# Altium PCB PCB1.PcbDoc
Units mm, origin at the board's own origin, x right, y up, seen from the top; angles counter-clockwise.
Board outline 60 x 50 mm, 2 copper layers (Top Layer, Bottom Layer); 43 components, 93 nets, 219 pads, 44 vias.
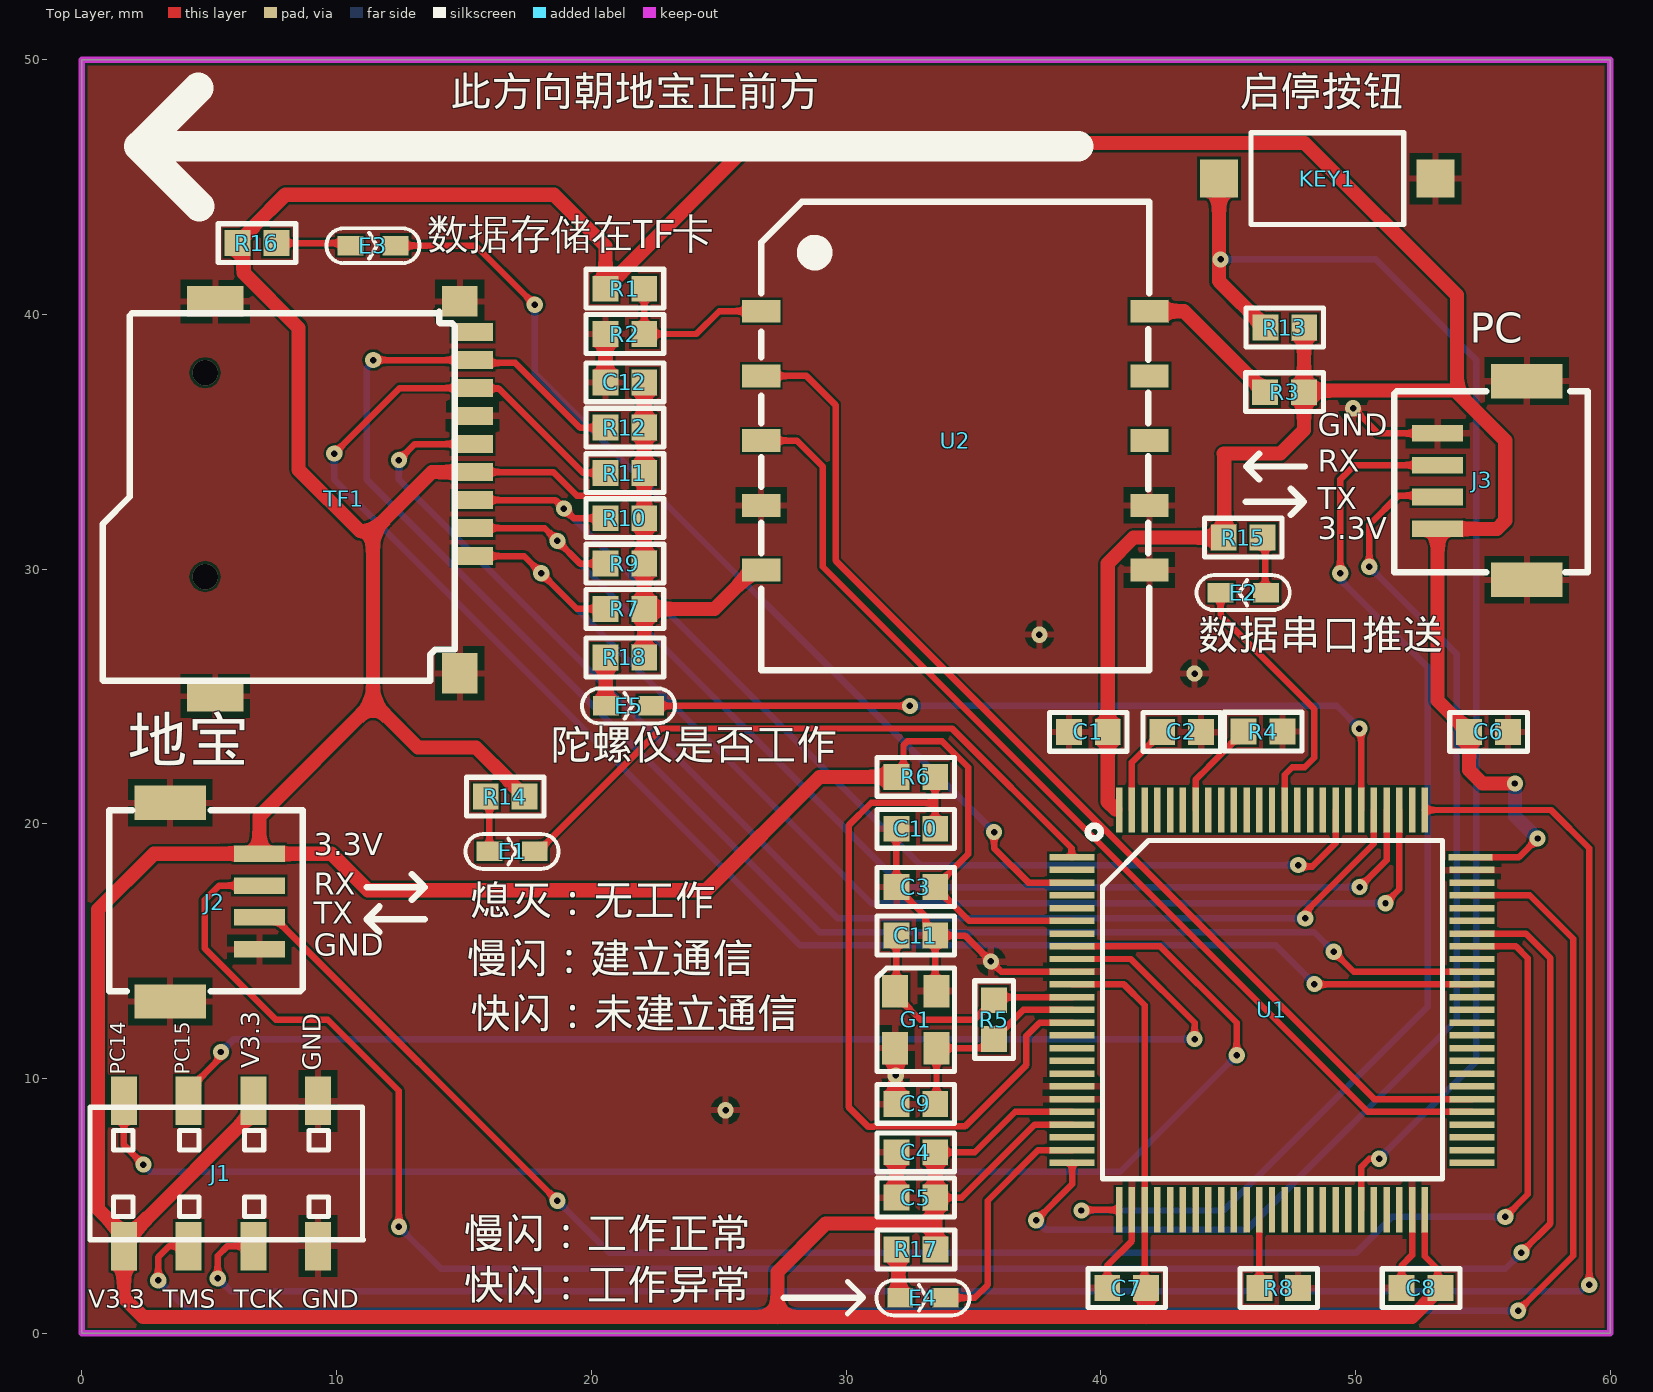
[diagram p0: Top Layer view]
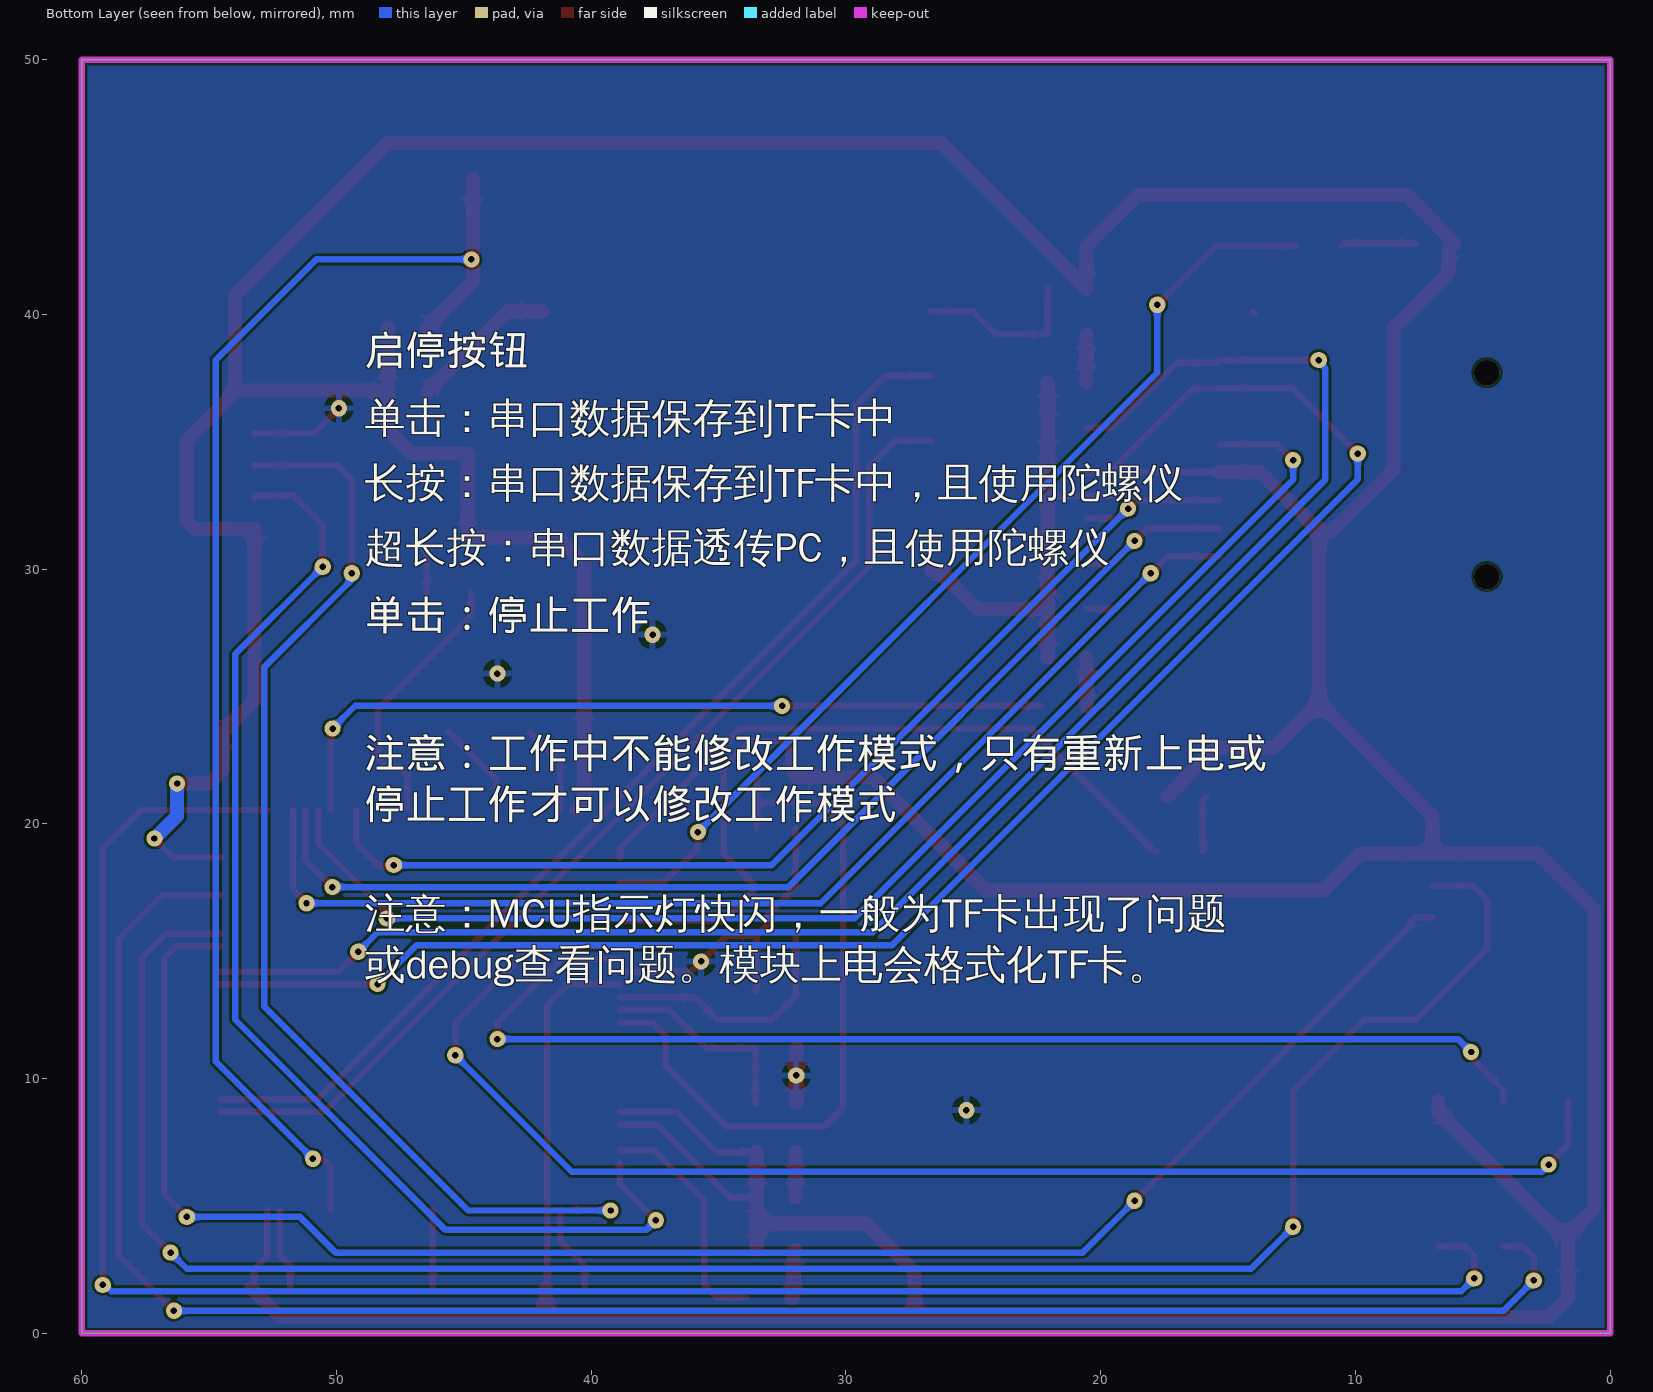
[diagram p1: Bottom Layer view, seen from below]

## Layer stack, top to bottom
Top Solder: solder mask 0.0102, Solder Resist, Dk 3.5
Top Layer: signal copper 0.0356
Dielectric 1: dielectric 0.32, FR-4, Dk 4.8
Bottom Layer: signal copper 0.0356
Bottom Solder: solder mask 0.0102, Solder Resist, Dk 3.5

## Board outline
0,0 60,0 60,50 0,50

## Design rules (kind name [scope] priority, off if disabled: settings)
Clearance [All] p1: gap=0.1 ignorepadtopadclearanceinfootprint=FALSE
PolygonConnect [All] p1: connectstyle=Relief reliefconductorwidth=0.254 reliefentries=4 polygonreliefangle="90 Angle" airgapwidth=0.254
RoutingVias [All] p1: holewidth=0.711 width=1.27 viastyle="Through Hole" minholewidth=0.711 minwidth=1.27 maxholewidth=0.711 maxwidth=1.27
SolderMaskExpansion [All] p1: expansion=0.102 istentingtop=FALSE
Width [All] p1: maxlimit=1.254 minlimit=0.254 preferedwidth=0.254
30 further rules are at their usual default settings.

## Components (designator, comment, footprint, x,y, rotation, side; value= is the part's Value field where it differs from the comment)
C1 "4.7u" 0603 40.259,23.61 r180 top
C2 "4.7u" 0603 43.925,23.61 r180 top
C3 "104" 0603 31.996,17.532 r0 top
C4 "105" 0603 33.485,7.106 r180 top
C5 "104" 0603 33.485,5.328 r180 top
C6 "104" 0603 54.483,23.622 r0 top
C7 "104" 0603 41.766,1.772 r180 top
C8 "104" 0603 53.323,1.772 r180 top
C9 "18pF" 0603 31.996,9.017 r0 top
C10 "104" 0603 33.485,19.806 r180 top
C11 "18pF" 0603 33.485,15.615 r180 top
C12 "104" 0603 22.063,37.332 r180 top
E1 "LED" LED_0603L 15.748,18.923 r0 top
E2 "LED" LED_0603L 46.736,29.083 r180 top
E3 "LED" LED_0603L 10.287,42.703 r0 top
E4 "LED" LED_0603L 31.877,1.397 r0 top
E5 "LED" LED_0603L 20.32,24.638 r0 top
G1 "25MHz(无源贴片)" G3225 32.741,12.319 r270 top
J1 "Pin HDR2X4" "PIN HDR2X4/2.54SMD" 1.651,4.953 r0 top
J2 "Pin HDR1X6" "PIN GH1.25-4PING SMD" 5.969,14.732 r270 top
J3 "Pin HDR1X6" "PIN GH1.25-4PING SMD" 54.229,35.687 r90 top
KEY1 "H-3650AADW(NC)" SW_PB_2P 48.895,45.339 r0 top value=SW_PB_2P
R1 "0" 0603 20.574,41.021 r0 top
R2 "0" 0603 20.574,39.243 r0 top
R3 "0" 0603 46.474,36.957 r0 top
R4 "1k" 0603 47.117,23.622 r180 top
R5 "1M" 0603 35.808,11.574 r90 top
R6 "1k" 0603 33.485,21.844 r180 top
R7 "47K" 0603 20.574,28.448 r0 top
R8 "1k" 0603 47.735,1.772 r180 top
R9 "47K" 0603 20.574,30.226 r0 top
R10 "47K" 0603 20.574,32.01 r0 top
R11 "47K" 0603 20.574,33.782 r0 top
R12 "47K" 0603 20.574,35.566 r0 top
R13 "1k" 0603 46.482,39.497 r0 top
R14 "1k" 0603 15.875,21.082 r0 top
R15 "1k" 0603 46.338,31.236 r180 top
R16 "1k" 0603 7.62,42.799 r180 top
R17 "1k" 0603 32.004,3.302 r0 top
R18 "1k" 0603 20.574,26.543 r0 top
TF1 "TF" TF 10.287,32.766 r180 top
U1 "STM32F207VCT6" LQFP-100 46.736,12.7 r0 top
U2 "espon_mode" ESPON_MODE 26.67,40.132 r0 top

## Footprints (in the part's own frame and the unit in brackets; to place one, negate y for a bottom-side part, rotate by r counter-clockwise, add the part's x,y. Pads: shape width x height; smd on the part's side, far side on the other; paste and mask are expansions set on the pad)
0603 [mil] "0603封装"
  rect 40x40 smd: 1(-0.68,-0.23) 2(59.32,-0.23)
  silkscreen extent -31,-30 89,30, body extent -1,-16 62,16, height 18
ESPON_MODE [mm] "espon_mode"
  rect 1.5x0.9 smd: 1(0,0) 2(0,-2.54) 3(0,-5.08) 4(0,-7.62) 5(0,-10.16) 6(15.24,-10.16) 7(15.24,-7.62) 8(15.24,-5.08) 9(15.24,-2.54) 10(15.24,0)
  silkscreen extent 0,-14.1 15.24,4.3
G3225 [mil] "3225贴片晶振"
  rect 50x40 smd: 1(-44,-32) 2(44,-32) 3(44,32) 4(-44,32)
  silkscreen extent -80,-60 80,60, body extent -63,-49 63,49, height 32
LED_0603L [mil] "LED"
  rect 40x30 smd: 1(10,0) 2(80,0)
  silkscreen extent -27,-27 117,27, body extent 14,-16 77,16, height 24
LQFP-100 [mil]
  rect 70x10 smd: 1(-309.5,236.22) 2(-309.5,216.53) 3(-309.5,196.85) 4(-309.5,177.16) 5(-309.5,157.48) 6(-309.5,137.79) 7(-309.5,118.11) 8(-309.5,98.42) 9(-309.5,78.74) 10(-309.5,59.05) 11(-309.5,39.37) 12(-309.5,19.68) 13(-309.5,0) 14(-309.5,-19.69) 15(-309.5,-39.37) 16(-309.5,-59.06) 17(-309.5,-78.74) 18(-309.5,-98.43) 19(-309.5,-118.11) 20(-309.5,-137.8) 21(-309.5,-157.48) 22(-309.5,-177.17) 23(-309.5,-196.85) 24(-309.5,-216.54) 25(-309.5,-236.22) 51(308.61,-236.22) 52(308.61,-216.54) 53(308.61,-196.85) 54(308.61,-177.17) 55(308.61,-157.48) 56(308.61,-137.8) 57(308.61,-118.11) 58(308.61,-98.43) 59(308.61,-78.74) 60(308.61,-59.06) 61(308.61,-39.37) 62(308.61,-19.69) 63(308.61,0) 64(308.61,19.68) 65(308.61,39.37) 66(308.61,59.05) 67(308.61,78.74) 68(308.61,98.42) 69(308.61,118.11) 70(308.61,137.79) 71(308.61,157.48) 72(308.61,177.16) 73(308.61,196.85) 74(308.61,216.53)
  rect 10x70 smd: 26(-236.67,-309.06) 27(-216.98,-309.06) 28(-197.3,-309.06) 29(-177.61,-309.06) 30(-157.93,-309.06) 31(-138.24,-309.06) 32(-118.55,-309.06) 33(-98.87,-309.06) 34(-79.18,-309.06) 35(-59.5,-309.06) 36(-39.82,-309.06) 37(-20.13,-309.06) 38(-0.45,-309.06) 39(19.24,-309.06) 40(38.93,-309.06) 41(58.61,-309.06) 42(78.3,-309.06) 43(97.98,-309.06) 44(117.66,-309.06) 45(137.35,-309.06) 46(157.03,-309.06) 47(176.72,-309.06) 48(196.41,-309.06) 49(216.09,-309.06) 50(235.78,-309.06) 76(235.78,309.05) 77(216.09,309.05) 78(196.41,309.05) 79(176.72,309.05) 80(157.04,309.05) 81(137.35,309.05) 82(117.67,309.05) 83(97.98,309.05) 84(78.3,309.05) 85(58.61,309.05) 86(38.93,309.05) 87(19.24,309.05) 88(-0.44,309.05) 89(-20.13,309.05) 90(-39.81,309.05) 91(-59.5,309.05) 92(-79.18,309.05) 93(-98.87,309.05) 94(-118.55,309.05) 95(-138.24,309.05) 96(-157.93,309.05) 97(-177.61,309.05) 98(-197.3,309.05) 99(-216.98,309.05) 100(-236.66,309.05)
  rect 68x10 smd: 75(306.61,236.22)
  silkscreen extent -285,-261 263,285, body extent -316,-321 315,309, height 57
"PIN GH1.25-4PING SMD" [mm] "GH1.25 4pin"
  rect 0.65x2 smd: 1(-4.1,1) 2(-2.85,1) 3(-1.6,1) 4(-0.35,1)
  rect 1.35x2.8 smd: 5(-6.1,-2.5) 6(1.7,-2.5)
  silkscreen extent -5.8,-4.9 1.3,2.7
"PIN HDR2X4/2.54SMD" [mm] "4pin双排2.54贴片"
  rect 1.02x1.9 smd: 1(0,-1.524) 2(0,4.176) 3(2.54,-1.524) 4(2.54,4.176) 5(5.08,-1.524) 6(5.08,4.176) 7(7.62,-1.524) 8(7.62,4.176)
  silkscreen extent -1.33,-1.27 9.4,3.93, body extent -1.27,-1.78 8.95,4.62, height 5.15
SW_PB_2P [mm] "2脚贴片按钮"
  rect 1.5x1.5 smd: 1(-4.25,0) 2(4.25,0)
  silkscreen extent -3,-1.8 3,1.8, body extent -3.28,-1.57 3.32,1.63, height 1.9
TF [mm] "TF卡"
  rect 1.6x0.7 smd: 1(-5.05,2.25) 2(-5.05,1.15) 3(-5.05,0.05) 4(-5.05,-1.05) 5(-5.05,-2.15) 6(-5.05,-3.25) 7(-5.05,-4.35) 8(-5.05,-5.45) 9(-5.05,-6.55)
  rect 1.4x1.2 smd: 10(-4.55,-7.75)
  rect 2.2x1.2 smd: 11(5.05,-7.75) 12(5.05,7.75)
  rect 1.4x1.6 smd: 13(-4.55,6.85)
  Top Layer lines w0.254: -3.688,-7.293 -3.738,-7.344
  silkscreen extent -4.35,-7.34 9.47,7.15

## Part data
C1 C2 C3 C4 C5 C6 C7 C8 C10: library part CAP, "贴片电容"
C9 C11: library part CAP, "无极电容"
C12: library part "CAP Nonpolarity", "无极电容"
E1 E2 E3 E4 E5: "LED灯"
G1: library part MM-11B, "无源晶振MCU使用"
KEY1: library part SW_PB_2P, "贴片按钮-2PIN(NC)", Manufacturer=?, CLASS=IO, Manufacturer_Part_Number=?, MFG_NAME01=?, MFG_PN01=?, PCB DECAL=SWEVQPA, Source_Path=E:\PROJECT\FREESCALE\IMX6\SCH\IMX_LIBRARY.OLB
R1 R2 R3 R4 R5 R6 R7 R8 R9 R10 R11 R12 R13 R14 R15 R16 R17 R18: library part R, "电阻"
TF1: "TF卡"
U1: library part STM32F207-1

## Via types
v1: diameter 0.635, hole 0.254, Top Layer to Bottom Layer, tented both sides, 42 vias
v2: diameter 1, hole 1, Top Layer to Bottom Layer, 2 vias

## Nets (pads, with @x,y where several pads share a name; then routed paths per layer and width w, separated by ;. In a path a pad name is that pad's centre, name@x,y a point inside that pad or via, vN(x,y) a via of type N, cw(c..) or ccw(c..) an arc to the next point about the centre after c; other vN are vias at no path point)
espon_rx: U1.55 U2.3 | length 41.1
  Top Layer w0.254: U2.3 28.067,35.052 29.083,34.036 29.083,30.099 50.482,8.7 U1.55
espon_tx: U1.56 U2.2 | length 43.2
  Top Layer w0.254: U2.2 28.448,37.592 29.591,36.449 29.591,30.347 50.738,9.2 U1.56
GND: C1.2 C2.1 C3.1 C4.2 C5.2 C6.2 C7.2 C8.2 C9.1 C10.2 C11.1 C12.2 G1.2 G1.4 J1.7 J1.8 J2.4 J2.5 J2.6 J3.4 J3.5 J3.6 KEY1.2 R2.1 R4.1 R8.1 TF1.6 TF1.10 TF1.11 TF1.12 TF1.13 U1.10 U1.19 U1.20 U1.27 U1.49 U1.74 U2.4 U2.6 U2.7 | length 29.3
  Top Layer w0.254: C9.1@31.928,9.062 C9.1 ; C10.2 C3.1 33.122,16.383 33.122,16.002 C11.1 ; G1.4 33.503,13.487 C11.1 ; U1.10 36.092,14.2 34.671,15.621 C11.1 ; C7.2 40.259,2.667 41.225,3.633 U1.27 ; v1(49.911,36.322) 50.896,35.337 J3.4 ; C8.2 51.816,2.667 52.225,3.076 U1.49
  Top Layer w0.554: C12.2 R2.1 ; C9.1@31.928,9.062 31.953,9.087 31.953,11.176 G1.2 ; C5.2 C4.2
  other v1: 25.273,8.763 31.953,10.132 35.687,14.605 43.688,25.908 37.592,27.432
IIC_SCL: J1.2 U1.8 | length 56.7
  Top Layer w0.254: J1.2 1.651,7.394 v1(2.418,6.627) ; U1.8 42.331,15.2 45.339,12.192 v1(45.339,10.922)
  Bottom Layer w0.254: v1@2.413,6.604 2.667,6.35 40.767,6.35 v1(45.339,10.922)
IIC_SDA: J1.4 U1.9 | length 47.4
  Top Layer w0.254: J1.4 4.191,9.569 5.388,10.766 5.388,10.976 v1(5.461,11.049) ; U1.9 41.18,14.7 43.688,12.192 v1(43.688,11.557)
  Bottom Layer w0.254: v1(5.461,11.049) 5.969,11.557 v1(43.688,11.557)
Jlink_TCK: J1.5 U1.76 | length 80.8
  Top Layer w0.254: v1(5.334,2.159) 5.334,3.048 5.715,3.429 J1.5 ; U1.76 57.682,20.55 59.182,19.05 v1(59.182,1.905)
  Bottom Layer w0.254: v1(5.334,2.159) 5.842,1.651 58.843,1.651 59.097,1.905 v1(59.182,1.905)
Jlink_TMS: J1.3 U1.72 | length 76.3
  Top Layer w0.254: v1(2.998,2.081) 2.998,2.998 3.429,3.429 J1.3 ; U1.72 56.841,17.2 58.547,15.494 58.547,3.048 v1(56.388,0.889)
  Bottom Layer w0.254: v1(2.998,2.081) 4.19,0.889 v1(56.388,0.889)
KEY1: KEY1.1 R13.1 U1.45 | length 53.7
  Top Layer w0.254: U1.45 50.225,6.537 50.546,6.858 v1(50.927,6.858)
  Top Layer w0.554: KEY1.1 44.645,41.311 R13.1
  Bottom Layer w0.254: v1(44.704,42.164) 50.8,42.164 54.737,38.227 54.737,10.668 v1(50.927,6.858)
MCU_LED: E3.2 U1.3 | length 38.8
  Top Layer w0.254: E3.2 15.463,42.703 v1(17.78,40.386) ; v1(35.814,19.685) 35.814,19.05 37.164,17.7 U1.3
  Bottom Layer w0.254: v1(17.78,40.386) 17.78,37.719 v1(35.814,19.685)
MCU_LED2: E2.2 U1.87 | length 10.8
  Top Layer w0.254: E2.2 44.704,28.194 48.387,24.511 48.387,22.606 48.006,22.225 47.52,22.225 47.225,21.93 U1.87
MCU_LED3: E1.2 U1.1 | length 25.4
  Top Layer w0.254: E1.2 17.907,18.923 22.733,23.749 34.163,23.749 38.862,19.05 38.862,18.7 U1.1
MCU_LED4: E4.2 U1.24 | length 9.3
  Top Layer w0.254: E4.2 35.052,1.397 35.56,1.905 35.56,5.207 37.553,7.2 U1.24
MCU_LED5: E5.2 U1.81 | length 31.4
  Top Layer w0.254: E5.2 v1(32.512,24.638) ; v1(50.157,23.748) 50.225,23.681 U1.81
  Bottom Layer w0.254: v1(32.512,24.638) 49.268,24.638 v1(50.157,23.748)
MCU_RST: C10.1 R6.1 U1.14 | length 28.3
  Top Layer w0.254: C10.1 33.503,20.831 ; R6.1 33.503,20.831 ; U1.14 37.6,12.2 37.084,11.684 37.084,10.541 34.671,8.128 31.115,8.128 31.093,8.106 30.883,8.106 30.099,8.89 30.099,19.939 30.991,20.831 33.503,20.831
MCU_RXD: J2.2 U1.69 | length 80.1
  Top Layer w0.254: J2.2 5.39,17.582 4.826,17.018 4.826,15.113 7.62,12.319 9.652,12.319 12.446,9.525 v1(12.446,4.191) ; U1.69 56.69,15.7 57.658,14.732 57.658,4.318 v1(56.515,3.175)
  Bottom Layer w0.254: v1(12.446,4.191) 14.097,2.54 55.88,2.54 v1(56.515,3.175)
MCU_SDIO_CLK: TF1.5 U1.80 | length 52
  Top Layer w0.254: v1(12.446,34.29) 13.072,34.916 TF1.5 ; v1(48.033,16.292) 48.069,16.329 48.069,16.573 50.725,19.229 U1.80
  Bottom Layer w0.254: v1(12.446,34.29) 12.446,33.528 29.682,16.292 v1(48.033,16.292)
MCU_SDIO_CMD: R10.1 TF1.3 U1.83 | length 43.3
  Top Layer w0.254: TF1.3 18.592,32.716 v1(18.923,32.385) 19.304,32.004 R10.1 ; v1(47.752,18.388) 47.816,18.324 48.296,18.324 49.225,19.253 U1.83
  Bottom Layer w0.254: v1(18.923,32.385) 32.92,18.388 v1(47.752,18.388)
MCU_SDIO_D0: R11.1 TF1.7 U1.65 | length 67
  Top Layer w0.254: v1(9.906,34.544) 12.478,37.116 TF1.7 15.355,37.098 16.369,37.098 19.177,34.29 19.685,33.782 20.551,33.782 R11.1 ; v1(48.387,13.716) 48.403,13.7 U1.65
  Bottom Layer w0.254: v1(9.906,34.544) 9.906,33.528 28.194,15.24 46.863,15.24 v1(48.387,13.716)
MCU_SDIO_D1: R12.1 TF1.8 U1.66 | length 66.4
  Top Layer w0.254: v1@11.43,38.227 v1(11.441,38.216) TF1.8 15.453,38.1 17.018,38.1 19.558,35.56 R12.1 ; v1(49.149,14.986) 49.935,14.2 U1.66
  Bottom Layer w0.254: v1(11.441,38.216) 11.441,38.142 11.176,37.877 11.176,33.528 28.956,15.748 48.387,15.748 v1(49.149,14.986)
MCU_SDIO_D2: R7.1 TF1.1 U1.78 | length 48.5
  Top Layer w0.254: TF1.1 17.363,30.516 v1(18.034,29.845) 19.431,28.448 20.551,28.448 R7.1 ; v1(51.181,16.891) 51.725,17.435 U1.78
  Bottom Layer w0.254: v1(18.034,29.845) 30.988,16.891 v1(51.181,16.891)
MCU_SDIO_D3: R9.1 TF1.2 U1.79 | length 46.4
  Top Layer w0.254: TF1.2 18.168,31.616 v1(18.669,31.115) 19.558,30.226 20.551,30.226 R9.1 ; v1(50.165,17.526) 51.225,18.586 U1.79
  Bottom Layer w0.254: v1(18.669,31.115) 32.258,17.526 v1(50.165,17.526)
MCU_TXD: J2.3 U1.68 | length 67.9
  Top Layer w0.254: J2.3 7.644,16.332 7.842,16.134 7.842,16.034 v1(18.669,5.207) ; U1.68 56.301,15.2 56.769,14.732 56.769,5.461 v1(55.88,4.572)
  Bottom Layer w0.254: v1(18.669,5.207) 20.701,3.175 50.038,3.175 51.435,4.572 v1(55.88,4.572)
NetC2_2: C2.2 U1.99 | length 3.6
  Top Layer w0.254: U1.99 41.225,22.423 C2.2
NetE1_1: E1.1 R14.1 | length 2.4
  Top Layer w0.254: E1.1@15.858,19.067 E1.1 16.002,20.932 R14.1
NetE2_1: E2.1 R15.1 | length 2.2
  Top Layer w0.254: R15.1 46.457,31.14 46.457,29.108 E2.1
NetE3_1: E3.1 R16.1 | length 2.9
  Top Layer w0.254: R16.1 10.439,42.805 E3.1
NetE4_1: E4.1 R17.1 | length 2
  Top Layer w0.554: R17.1 32.059,3.224 32.059,1.469 E4.1
NetE5_1: E5.1 R18.1 | length 1.9
  Top Layer w0.554: R18.1 20.565,26.528 20.565,24.647 E5.1
NetR1_2: R1.2 R2.2 U2.1 | length 6.7
  Top Layer w0.254: R1.2 R2.2 24.124,39.237 25.019,40.132 U2.1
NetR3_1: R3.1 U2.10 | length 5.9
  Top Layer w0.554: U2.10 43.276,40.132 R3.1
NetR4_2: R4.2 U1.94 | length 3.9
  Top Layer w0.254: U1.94 43.725,21.732 44.218,22.225 44.218,22.235 R4.2
OSCIN: C11.2 G1.1 R5.2 U1.12 | length 10.1
  Top Layer w0.254: C11.2 31.979,13.36 31.928,13.31 32.918,12.319 35.052,12.319 R5.2 35.933,13.2 U1.12
OSCOUT: C9.2 G1.3 R5.1 U1.13 | length 8.2
  Top Layer w0.254: C9.2 33.553,9.062 G1.3 35.458,11.201 R5.1 36.957,12.7 U1.13
PA0: U1.23
PA4: U1.29
PA5: U1.30
PA6: U1.31
PA7: U1.32
PA8: U1.67
PA11: U1.70
PA12: U1.71
PA15: U1.77
PB0: U1.35
PB1: U1.36
PB2: R8.2 U1.37 | length 3.1
  Top Layer w0.254: U1.37 46.225,1.781 R8.2
PB3: U1.89
PB4: U1.90
PB5: U1.91
PB6: U1.92
PB7: U1.93
PB8: U1.95
PB9: U1.96
PB10: U1.47
PB11: U1.48
PB12: U1.51
PB13: U1.52
PB14: U1.53
PB15: U1.54
PC0: U1.15
PC1: U1.16
PC2: U1.17
PC3: U1.18
PC4: U1.33
PC5: U1.34
PC6: U1.63
PC7: U1.64
PC13: U1.7
PD1: U1.82
PD3: U1.84
PD4: U1.85
PD5: U1.86
PD7: U1.88
PD10: U1.57
PD11: U1.58
PD12: U1.59
PD13: U1.60
PD14: U1.61
PD15: U1.62
PE0: U1.97
PE1: U1.98
PE5: U1.4
PE6: U1.5
PE7: U1.38
PE8: U1.39
PE9: U1.40
PE10: U1.41
PE11: U1.42
PE12: U1.43
PE13: U1.44
PE15: U1.46
UART2-RX: J3.3 U1.26 | length 44.6
  Top Layer w0.254: v1(39.243,4.826) 39.267,4.85 U1.26 ; v1(49.403,29.845) 49.403,33.528 49.962,34.087 J3.3
  Bottom Layer w0.254: v1(39.243,4.826) 44.831,4.826 52.832,12.827 52.832,26.162 49.403,29.591 v1(49.403,29.845)
UART2-TX: J3.2 U1.25 | length 47
  Top Layer w0.254: v1(37.465,4.445) 38.875,5.855 U1.25 ; v1(50.546,30.099) 50.546,31.75 51.689,32.893 53.173,32.893 J3.2
  Bottom Layer w0.254: v1(37.465,4.445) 37.846,4.064 45.72,4.064 53.975,12.319 53.975,26.67 v1(50.546,30.099)
VCC3.3: C1.1 C3.2 C4.1 C5.1 C6.1 C7.1 C8.1 C12.1 J1.1 J1.6 J2.1 J3.1 R1.1 R3.2 R6.2 R7.2 R9.2 R10.2 R11.2 R12.2 R13.2 R14.2 R15.2 R16.2 R17.2 R18.2 TF1.4 U1.6 U1.11 U1.21 U1.22 U1.28 U1.50 U1.75 U1.100 U2.5 | length 350.7
  Top Layer w0.254: TF1.4 18.508,33.816 19.431,32.893 22.078,32.893 22.081,32.89 ; R6.2 32.258,22.129 32.258,23.092 32.407,23.241 33.782,23.241 34.798,22.225 34.798,18.821 C3.2 34.829,16.2 U1.6 ; C5.1 34.544,5.334 37.41,8.2 U1.22 ; C4.1 35.052,7.112 36.64,8.7 U1.21 ; U1.11 40.91,13.7 41.725,12.885 U1.28 41.725,1.836 C7.1 ; U1.50 52.725,3.028 53.235,2.518 53.235,1.883 C8.1 ; U1.75 56.419,18.7 v1(57.15,19.431)
  Top Layer w0.554: J1.1@2.144,4.102 6.731,8.689 J1.6 ; TF1.4 13.75,33.816 11.43,31.496 ; R14.2 16.759,21.699 16.759,21.724 15.478,23.004 13.191,23.004 11.43,24.765 ; R18.2 R7.2 ; C12.1 R12.2 R11.2 22.081,32.89 R10.2 R9.2 R7.2 ; U2.5 26.37,29.972 24.84,28.442 R7.2 ; R6.2 28.962,21.85 24.511,17.399 11.23,17.399 9.797,18.832 J2.1 ; C4.1 C5.1 33.507,5.33 33.507,4.315 ; R17.2 33.507,3.3 33.507,4.315 ; 40.575,20.576 40.276,20.874 C1.1 40.276,30.226 41.292,31.242 R15.2 44.848,31.259 44.848,34.527 44.831,34.544 47.053,34.544 47.981,35.471 R3.2 R3.2@47.985,36.955 ; C7.1 41.783,0.639 ; R13.2 47.985,39.487 R3.2@47.985,36.955 ; C8.1 52.717,1.155 52.717,1.13 52.226,0.639 41.783,0.639 ; v1(56.261,21.59) 54.991,21.59 54.466,22.115 C6.1 53.229,24.853 J3.1 55.555,31.587 55.88,31.912 55.88,35.052 53.981,36.951 ; J2.1 2.83,18.832 0.635,16.637 0.635,4.885 1.651,3.869 J1.1 1.651,1.397 2.409,0.639 27.305,0.639 ; J2.1 6.969,20.304 11.43,24.765 ; 11.43,24.765 11.43,31.496 ; 11.43,31.496 10.922,31.496 8.509,33.909 8.509,39.477 6.344,41.642 6.344,42.574 R16.2 6.736,43.428 6.736,43.453 7.987,44.704 18.542,44.704 20.557,42.689 R1.1 21.179,41.638 21.179,41.663 26.252,46.736 48.006,46.736 53.981,40.761 53.981,36.951 ; 27.305,0.639 41.783,0.639 ; 27.305,0.639 27.305,2.413 29.207,4.315 33.507,4.315 ; R3.2@47.985,36.955 48.046,37.016 53.916,37.016 53.981,36.951
  Bottom Layer w0.554: v1(56.261,21.59) 56.261,20.32 v1(57.15,19.431)
pads on no net: TF1.9 U1.2 U1.73 U2.8 U2.9
copper on no net:
  other v2: 4.837,29.716 4.837,37.716

## Polygon pours and split planes (outlines as drawn)
GND on Top Layer "GND_L01_P000" (solid, pour order 0): 0,0 60,0 60,50 0,50
GND on Bottom Layer "GND_L02_P001" (solid, pour order 1): 0,0 60,0 60,50 0,50

## Keep-outs
Keep-Out Layer:
  the board outline again, w0.254

## Silkscreen, mask and mechanical layers (free items; w line width, h text height)
Top Overlay:
  lines w0.2: 30.058,0.771 30.693,1.406 30.058,2.041
  lines w0.254: 11.176,16.256 13.462,16.256 ; 11.176,17.526 13.462,17.526 ; 11.212,16.22 11.684,15.748 ; 11.212,16.292 11.684,16.764 ; 12.954,17.018 13.426,17.49 ; 12.954,18.034 13.426,17.562 ; 27.559,1.397 30.48,1.397 ; 45.69,32.648 47.976,32.648 ; 45.72,34.036 48.006,34.036 ; 45.756,34 46.228,33.528 ; 45.756,34.072 46.228,34.544 ; 47.467,32.14 47.94,32.613 ; 47.468,33.156 47.94,32.684
  lines w1.2: 2.349,46.672 4.572,48.895 ; 4.608,44.256 2.255,46.609 39.116,46.609
  text "此方向朝地宝正前方" at 14.48,47.806 h2
  text "启停按钮" at 45.468,47.806 h2
  text "数据存储在TF卡" at 13.589,42.218 h2
  text "PC" at 54.483,38.503 h2
  text "GND" at 48.514,34.942 h1.5
  text "RX" at 48.514,33.528 h1.5
  text "TX" at 48.514,32.062 h1.5
  text "3.3V" at 48.514,30.878 h1.5
  text "数据串口推送" at 43.815,26.47 h2
  text "陀螺仪是否工作" at 18.417,22.152 h2
  text "地宝" at 1.781,21.872 h3
  text "3.3V" at 9.096,18.472 h1.5
  text "RX" at 9.096,16.932 h1.5
  text "熄灭：无工作" at 15.242,16.049 h2
  text "TX" at 9.096,15.789 h1.5
  text "GND" at 9.096,14.535 h1.5
  text "慢闪：建立通信" at 15.115,13.77 h2
  text "快闪：未建立通信" at 15.24,11.611 h2
  text "V3.3" at 7.192,10.411 h1.22 r90
  text "GND" at 9.621,10.307 h1.22 r90
  text "PC14" at 1.894,10.16 h1 r90
  text "PC15" at 4.434,10.16 h1 r90
  text "慢闪：工作正常" at 14.988,2.968 h2
  text "快闪：工作异常" at 14.986,0.943 h2
  text "V3.3" at 0.255,0.776 h1.22
  text "TMS" at 3.175,0.776 h1.22
  text "TCK" at 5.969,0.776 h1.22
  text "GND" at 8.636,0.776 h1.22
Bottom Overlay:
  text "启停按钮" at 48.893,37.646 h2
  text "单击：串口数据保存到TF卡中" at 48.895,34.979 h2
  text "长按：串口数据保存到TF卡中，且使用陀螺仪" at 48.893,32.439 h2
  text "超长按：串口数据透传PC，且使用陀螺仪" at 48.895,29.907 h2
  text "单击：停止工作" at 48.895,27.225 h2
  text "注意：工作中不能修改工作模式，只有重新上电或 / 停止工作才可以修改工作模式" at 48.895,19.812 h2
  text "注意：MCU指示灯快闪，一般为TF卡出现了问题 / 或debug查看问题。模块上电会格式化TF卡。" at 48.895,13.529 h2